# Altium PCB Buck converter.PcbDoc
Units mm, origin at the board's own origin, x right, y up, seen from the top; angles counter-clockwise.
Board outline 33 x 15 mm, 2 copper layers (Top Layer, Bottom Layer); 20 components, 7 nets, 42 pads, 17 vias.
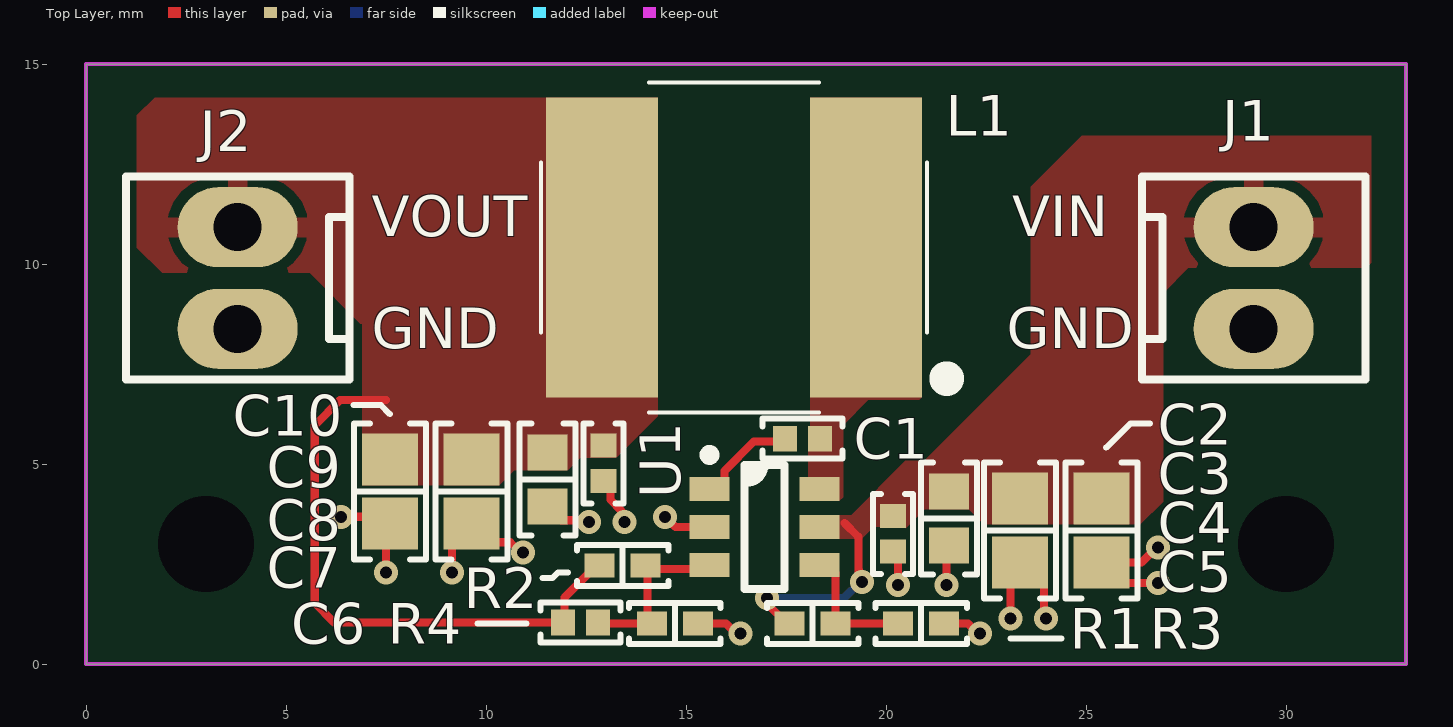
[diagram p0: Top Layer view]
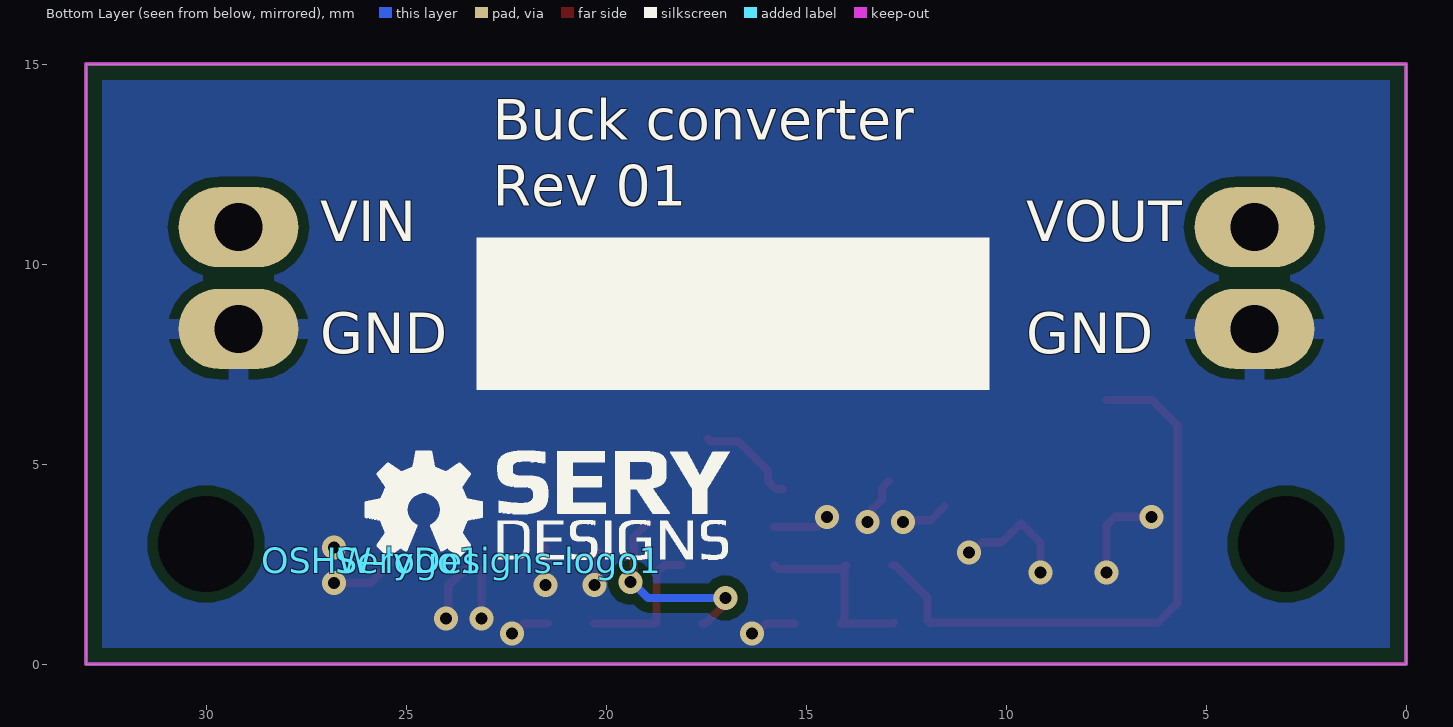
[diagram p1: Bottom Layer view, seen from below]

## Layer stack, top to bottom
Top Solder: solder mask 0.0102, Solder Resist, Dk 3.5
Top Layer: signal copper 0.0356
Dielectric 1: dielectric 0.32, FR-4, Dk 4.8
Bottom Layer: signal copper 0.0356
Bottom Solder: solder mask 0.0102, Solder Resist, Dk 3.5

## Board outline
0,0 0,15 33,15 33,0

## Design rules (kind name [scope] priority, off if disabled: settings)
BoardOutlineClearance [All] p1: gap=0.4 ignorepadtopadclearanceinfootprint=FALSE
Clearance [All] p1: gap=0.254 ignorepadtopadclearanceinfootprint=FALSE except(0: SMDPad-Hole THPad-Hole Via-Hole Fill-Hole Poly-Hole Region-Hole Text-Hole; 0.127: SMDPad-SMDPad; 0.2: Arc-SMDPad Arc-THPad Track-SMDPad Track-THPad; 0.5: SMDPad-THPad THPad-THPad THPad-Via)
HoleSize [All] p1: absolutevalues=TRUE maxlimit=2.54 minlimit=0.3 maxpercent=80.000 minpercent=20.000
HoleToHoleClearance [All] p1: gap=0.5 allowstackedmicrovias=TRUE
MinimumAnnularRing [All] p1: minimumring=0.13
MinimumSolderMaskSliver [All] p1: minsoldermaskwidth=0.12
PolygonConnect [All] p1: connectstyle=Relief reliefconductorwidth=0.254 reliefentries=4 polygonreliefangle="90 Angle" airgapwidth=0.254
RoutingVias [All] p1: holewidth=0.3 width=0.6 viastyle="Through Hole" minholewidth=0.3 minwidth=0.5 maxholewidth=0.6 maxwidth=1
SilkToSilkClearance [All] p1: silktosilkclearance=0
SilkToSolderMaskClearance [IsPad] p1: minsilkscreentomaskgap=0.05 clearancetoexposedcopper=TRUE
SolderMaskExpansion [All] p1: expansion=0.05 istentingtop=FALSE
Width [All] p1: maxlimit=1.016 minlimit=0.127 preferedwidth=0.203
25 further rules are at their usual default settings.

## Components (designator, comment, footprint, x,y, rotation, side; value= is the part's Value field where it differs from the comment)
C1 "0.1 µF" "CAP 0402_1005" 17.907,5.639 r180 top
C2 "10 µF" "CAP 0805_2012" 25.38,3.343 r90 top
C3 "10 µF" "CAP 0805_2012" 23.348,3.343 r90 top
C4 "1 µF" "CAP 0603_1608" 21.57,3.643 r90 top
C5 "0.1 µF" "CAP 0402_1005" 20.173,3.258 r90 top
C6 "12 pF" "CAP 0402_1005" 12.362,1.041 r180 top
C7 "0.1 µF" "CAP 0402_1005" 12.934,5.021 r90 top
C8 "1 µF" "CAP 0603_1608" 11.537,4.621 r90 top
C9 "10 µF" "CAP 0805_2012" 9.632,4.321 r90 top
C10 "10 µF" "CAP 0805_2012" 7.6,4.321 r90 top
J1 "0022272021" "MOLEX KK 0022272021" 29.19,9.652 r270 top
J2 "0022272021" "MOLEX KK 0022272021" 3.79,9.652 r90 top
L1 "22uH" NRS8040T220MJGJV 16.197,10.414 r180 top value=22µH
OSHW-logo1 "OSHW-logo" OSHW-logo 25.857,2.591 r180 bottom
R1 "22k" "RES 0402_1005" 18.162,1.016 r180 top
R2 "110k" "RES 0402_1005" 13.411,2.464 r180 top
R3 "10k" "RES 0402_1005" 20.875,1.016 r180 top
R4 "15k" "RES 0402_1005" 14.718,1.016 r180 top
SeryDesigns-logo1 "SeryDesigns-logo" SeryDesigns-logo 22.682,2.591 r180 bottom
U1 "RT6222D" sot23-6 16.959,3.429 r0 top value=SGM61410

## Footprints (in the part's own frame and the unit in brackets; to place one, negate y for a bottom-side part, rotate by r counter-clockwise, add the part's x,y. Pads: shape width x height; smd on the part's side, far side on the other; paste and mask are expansions set on the pad)
"CAP 0402_1005" [mm] "Chip Capacitor, 2-Leads, Body 1.02x0.51mm, IPC Medium Density"
  rect 0.6x0.64 smd: 1(-0.44,0) 2(0.44,0)
  silkscreen extent -1,-0.5 1,0.5, body extent -0.5,-0.26 0.5,0.26, height 0.52
"CAP 0603_1608" [mm] "Chip Capacitor, 2-Leads, Body 1.60x0.80mm, IPC Medium Density"
  rect 0.9x1 smd: 1(-0.675,0) 2(0.675,0)
  silkscreen extent -1.4,-0.7 1.4,0.7, body extent -0.8,-0.41 0.8,0.41, height 0.82
"CAP 0805_2012" [mm] "Chip Capacitor, 2-Leads, Body 2.00x1.20mm, IPC Medium Density"
  rect 1.3x1.4 smd: 1(-0.8,0) 2(0.8,0)
  silkscreen extent -1.7,-0.9 1.7,0.9, body extent -1,-0.64 1,0.64, height 1.26
"MOLEX KK 0022272021" [mm]
  oval 2x3 hole 1.2: 1(-1.27,0) 2(1.27,0)
  silkscreen extent -2.54,-2.79 2.54,2.79, body extent -2.54,-2.9 2.54,2.9, height 11.7
NRS8040T220MJGJV [mil]
  rect 110x295 smd paste+0 mask+0: 1(-130,0) 2(130,0)
  silkscreen extent -211,-162 190,162, body extent -157,-160 157,155, height 157
OSHW-logo [mm] "OSHW logo, no writing"
  silkscreen extent -0.17,0.1 2.77,2.74
"RES 0402_1005" [mm] "Chip Resistor, 2-Leads, Body 1.0x0.5mm, IPC Medium Density"
  rect 0.75x0.6 smd: 1(-0.575,0) 2(0.575,0)
  silkscreen extent -1.14,-0.51 1.14,0.51, body extent -0.5,-0.25 0.5,0.25, height 0.35
SeryDesigns-logo [mm] "Sery designs logo"
  silkscreen extent -0.04,0.02 5.77,2.74
sot23-6 [mm] "SOT23, 6-Leads, Body 2.90x2.80mm, Pitch 0.95mm, IPC Medium Density"
  rect 1x0.6 smd: 1(-1.375,0.95) 2(-1.375,0) 3(-1.375,-0.95) 4(1.375,-0.95) 5(1.375,0) 6(1.375,0.95)
  silkscreen extent -1.5,-1.55 0.5,1.92, body extent -1.5,-1.5 1.5,1.5, height 1.45

## Part data
C1 C5 C7: library part GRT155R71H104KE01D, "CAP CER 0.1UF 50V X7R 0402", Device Package="0402 (1005 Metric)", manufacturer="Murata Electronics", Operating Temperature="-55°C ~ 125°C", Ratings=AEC-Q200, Supplier Part Number 1=490-GRT155R71H104KE01DCT-ND, Temperature Coefficient=X7R, Tolerance=±10%, Voltage - Rated=50V, Applications=Automotive, Capacitance="0.1 µF", componentlink2description="DigiKey Link", componentlink2url=https://www.digikey.com/en/products/detail/murata-electronics/GRT155R71H104KE01D/10704679, lastupdated="9/19/2022 12:56:46 PM", Lifecycle Status=Active, Minimum Order=1, Mounting Type="Surface Mount, MLCC", Package / Case="0402 (1005 Metric)", packaging=TapeAndReel, Part Number=GRT155R71H104KE01D, Part Status=Active, partid=44223, price=0.01, series=GRT, Size / Dimension="0.039\" L x 0.020\" W (1.00mm x 0.50mm)", Supplier 1=DigiKey, Thickness (Max)="0.022\" (0.55mm)"
C2 C3 C9 C10: library part GRM21BR61H106ME43L, "CAP CER 10UF 50V X5R 0805", Device Package="0805 (2012 Metric)", manufacturer="Murata Electronics", Operating Temperature="-55°C ~ 85°C", Supplier Part Number 1=490-18664-1-ND, Temperature Coefficient=X5R, Tolerance=±20%, Voltage - Rated=50V, Applications="General Purpose", Capacitance="10 µF", componentlink1description=Datasheet, componentlink1url=https://search.murata.co.jp/Ceramy/image/img/A01X/G101/ENG/GRM21BR61H106ME43-01A.pdf, componentlink2description="DigiKey Link", componentlink2url=https://www.digikey.com/en/products/detail/murata-electronics/GRM21BR61H106ME43L/10326317, lastupdated="9/19/2022 1:04:12 PM", Lifecycle Status=Active, Minimum Order=1, Mounting Type="Surface Mount, MLCC", Package / Case="0805 (2012 Metric)", packaging=TapeAndReel, Part Number=GRM21BR61H106ME43L, Part Status=Active, partid=41295, price=0.08, series=GRM, Size / Dimension="0.079\" L x 0.049\" W (2.00mm x 1.25mm)", Supplier 1=DigiKey, Thickness (Max)="0.057\" (1.45mm)"
C4 C8: library part UMK107AB7105KA-T, "CAP CER 1UF 50V X7R 0603", Device Package="0603 (1608 Metric)", manufacturer="Taiyo Yuden", Operating Temperature="-55°C ~ 125°C", Supplier Part Number 1=587-3247-1-ND, Temperature Coefficient=X7R, Tolerance=±10%, Voltage - Rated=50V, Applications="SMPS Filtering", Capacitance="1 µF", componentlink1description=Datasheet, componentlink1url=https://www.yuden.co.jp/productdata/catalog/mlcc01_e.pdf, componentlink2description="DigiKey Link", componentlink2url=https://www.digikey.com/en/products/detail/taiyo-yuden/UMK107AB7105KA-T/3660085, lastupdated="9/19/2022 1:00:51 PM", Lifecycle Status=Active, Minimum Order=1, Mounting Type="Surface Mount, MLCC", Package / Case="0603 (1608 Metric)", packaging=TapeAndReel, Part Number=UMK107AB7105KA-T, Part Status=Active, partid=46688, price=0.04, series=M, Size / Dimension="0.063\" L x 0.031\" W (1.60mm x 0.80mm)", Supplier 1=DigiKey, Thickness (Max)="0.037\" (0.95mm)"
C6: library part GCM1555C1H120JA16D, "CAP CER 12PF 50V C0G/NP0 0402", Device Package="0402 (1005 Metric)", manufacturer="Murata Electronics", Operating Temperature="-55°C ~ 125°C", Ratings=AEC-Q200, Supplier Part Number 1=490-12649-1-ND, Temperature Coefficient="C0G, NP0", Tolerance=±5%, Voltage - Rated=50V, Applications=Automotive, Capacitance="12 pF", componentlink1description=Datasheet, componentlink1url=https://www.murata.com/~/media/webrenewal/support/library/catalog/products/capacitor/mlcc/c03e.ashx?la=en-us, componentlink2description="DigiKey Link", componentlink2url=https://www.digikey.com/en/products/detail/murata-electronics/GCM1555C1H120JA16D/4903551, lastupdated="9/19/2022 12:57:22 PM", Lifecycle Status=Active, Minimum Order=1, Mounting Type="Surface Mount, MLCC", Package / Case="0402 (1005 Metric)", packaging=TapeAndReel, Part Number=GCM1555C1H120JA16D, Part Status=Active, partid=5824, price=0.01, series=GCM, Size / Dimension="0.039\" L x 0.020\" W (1.00mm x 0.50mm)", Supplier 1=DigiKey, Thickness (Max)="0.022\" (0.55mm)"
J1 J2: "CONN HEADER VERT 2POS 2.54MM", Insulation Color=Natural, manufacturer=Molex, Material Flammability Rating="UL94 V-0", Supplier Part Number 1=WM4111-ND, componentlink1description=Datasheet, componentlink1url=https://www.molex.com/pdm_docs/sd/022272021_sd.pdf, componentlink2description="DigiKey Link", componentlink2url=http://digikey.com/product-detail/en/molex/0022272021/WM4111-ND/1130577, Connector Type=Header, Contact Finish - Mating=Tin, Contact Finish - Post=Tin, Contact Finish Thickness - Mating="100.0µin (2.54µm)", Contact Length - Mating="0.295\" (7.49mm)", Contact Length - Post="0.140\" (3.56mm)", Contact Material=Brass, Contact Shape=Square, Contact Type="Male Pin", Fastening Type="Friction Lock", Insulation Height="0.461\" (11.70mm)", Insulation Material="Polyamide (PA), Nylon", lastupdated="1/12/2020 11:51:43 PM", Lifecycle Status=Active, Minimum Order=1, Mounting Type="Through Hole", Number of Positions=2, Number of Positions Loaded=All, Number of Rows=1, Overall Contact Length="0.560\" (14.22mm)", packaging=Bulk, Part Number=0022272021, Part Status=Active, partid=76, Pitch - Mating="0.100\" (2.54mm)", price=0.27, series="KK 6410", Shrouding="Shrouded - 1 Wall", Style="Board to Cable/Wire", Supplier 1=DigiKey, Termination=Solder
L1: library part NRS8040T220MJGJV, "Inductor, Fixed, SMD, 22µH, 2.2A", Current=2.2A, Package="Custom SMT", Part Number=6006M0220F000, Power=N/A, Supplier Part Number 1=587-3655-2-ND, Temp Range="-40°C ~ 125°C", Tolerance=±20%, componentlink1description=Datasheet, componentlink1url=https://ds.yuden.co.jp/TYCOMPAS/ut/detail?pn=LCXNH8080YKL220MJG&u=M, Family="Inductors (Fixed)", MF="Taiyo Yuden", Mount Type=SMT, MPN=NRS8040T220MJGJV, Special=N/A, Supplier 1=Digi-Key, Voltage=N/A
OSHW-logo1: "OSHW logo, no writing"
R1: library part CR0402-FX-2202GLF, "RES SMD 22K OHM 1% 1/16W 0402", Device Package="0402 (1005 Metric)", manufacturer="Bourns Inc.", Operating Temperature="-55°C ~ 155°C", Power (Watts)="0.063W, 1/16W", Resistance="22 kOhms", Supplier Device Package=0402, Supplier Part Number 1=CR0402-FX-2202GLFCT-ND, Temperature Coefficient=±100ppm/°C, Tolerance=±1%, componentlink1description=Datasheet, componentlink1url=https://www.bourns.com/docs/Product-Datasheets/CR0402.pdf, componentlink2description="DigiKey Link", componentlink2url=https://www.digikey.com/en/products/detail/bourns-inc/CR0402-FX-2202GLF/3783230, Composition="Thick Film", Height - Seated (Max)="0.016\" (0.40mm)", lastupdated="9/19/2022 1:14:50 PM", Lifecycle Status=Active, Minimum Order=1, Number of Terminations=2, Package / Case="0402 (1005 Metric)", packaging=CutTape, Part Number=CR0402-FX-2202GLF, Part Status=Active, partid=6638, price=0.01, series=CR0402, Size / Dimension="0.039\" L x 0.020\" W (1.00mm x 0.50mm)", Supplier 1=DigiKey
R2: library part AF0402FR-07110KL, "RES SMD 110K OHM 1% 1/16W 0402", Device Package="0402 (1005 Metric)", manufacturer=Yageo, Operating Temperature="-55°C ~ 155°C", Power (Watts)="0.063W, 1/16W", Ratings=AEC-Q200, Resistance="110 kOhms", Supplier Device Package=0402, Supplier Part Number 1=13-AF0402FR-07110KLCT-ND, Temperature Coefficient=±100ppm/°C, Tolerance=±1%, componentlink1description=Datasheet, componentlink1url=https://www.yageo.com/upload/media/product/productsearch/datasheet/rchip/PYu-AF_51_RoHS_L_6.pdf, componentlink2description="DigiKey Link", componentlink2url=https://www.digikey.com/en/products/detail/yageo/AF0402FR-07110KL/5900404, Composition="Thick Film", Features="Anti-Sulfur, Automotive AEC-Q200", Height - Seated (Max)="0.015\" (0.37mm)", lastupdated="9/19/2022 1:13:54 PM", Lifecycle Status=Active, Minimum Order=1, Number of Terminations=2, Package / Case="0402 (1005 Metric)", packaging=TapeAndReel, Part Number=AF0402FR-07110KL, Part Status=Active, partid=60378, price=0.01, series=AF, Size / Dimension="0.039\" L x 0.020\" W (1.00mm x 0.50mm)", Supplier 1=DigiKey
R3: library part RE0402FRE0710KL, "RES SMD 10K OHM 1% 1/16W 0402", Device Package="0402 (1005 Metric)", manufacturer=Yageo, Operating Temperature="-55°C ~ 155°C", Power (Watts)="0.063W, 1/16W", Resistance="10 kOhms", Supplier Device Package=0402, Supplier Part Number 1=13-RE0402FRE0710KLCT-ND, Temperature Coefficient=±50ppm/°C, Tolerance=±1%, componentlink1description=Datasheet, componentlink1url=https://www.yageo.com/upload/media/product/productsearch/datasheet/rchip/PYu-RE_105_RoHS_L_6.pdf, componentlink2description="DigiKey Link", componentlink2url=https://www.digikey.com/en/products/detail/yageo/RE0402FRE0710KL/5922980, Composition="Thick Film", Height - Seated (Max)="0.015\" (0.37mm)", lastupdated="9/19/2022 1:13:38 PM", Lifecycle Status=Active, Minimum Order=1, Number of Terminations=2, Package / Case="0402 (1005 Metric)", packaging=CutTape, Part Number=RE0402FRE0710KL, Part Status=Active, partid=68060, price=0.01, series=RE, Size / Dimension="0.039\" L x 0.020\" W (1.00mm x 0.50mm)", Supplier 1=DigiKey
R4: library part CRCW040215K0FKED, "RES SMD 15K OHM 1% 1/16W 0402", Device Package="0402 (1005 Metric)", manufacturer="Vishay Dale", Operating Temperature="-55°C ~ 155°C", Power (Watts)="0.063W, 1/16W", Ratings=AEC-Q200, Resistance="15 kOhms", Supplier Device Package=0402, Supplier Part Number 1=541-15.0KLCT-ND, Temperature Coefficient=±100ppm/°C, Tolerance=±1%, componentlink1description=Datasheet, componentlink1url=http://www.vishay.com/docs/20035/dcrcwe3.pdf, componentlink2description="DigiKey Link", componentlink2url=https://www.digikey.com/en/products/detail/vishay-dale/CRCW040215K0FKED/1178139, Composition="Thick Film", Features="Automotive AEC-Q200", Height - Seated (Max)="0.016\" (0.40mm)", lastupdated="9/19/2022 1:14:19 PM", Lifecycle Status=Active, Minimum Order=1, Number of Terminations=2, Package / Case="0402 (1005 Metric)", packaging=CutTape, Part Number=CRCW040215K0FKED, Part Status=Active, partid=16217, price=0.01, series=CRCW, Size / Dimension="0.039\" L x 0.020\" W (1.00mm x 0.50mm)", Supplier 1=DigiKey
SeryDesigns-logo1: "Sery designs logo"
U1: "IC, SMD, 2A, 1.4MHz,  Synchronous Buck Converter, SOT-23-6", MPN=SGM61410, Package=SOT-23-6, Part Number=710GLSGM61410, Supplier Part Number 1=N/A, componentlink1description=Datasheet, componentlink1url=http://www.sg-micro.com/uploads/soft/20220513/1652411174.pdf, Family=ICs, MF=SGMicro, Mount Type=SMT, Supplier 1=Digi-Key, Temp Range=N/A

## Free pads (board coordinates)
  round 0 hole 2.4 unplated: 1(3,3) 2(30,3)

## Via types
v1: diameter 0.6, hole 0.3, Top Layer to Bottom Layer, tented both sides, 17 vias

## Nets (pads, with @x,y where several pads share a name; then routed paths per layer and width w, separated by ;. In a path a pad name is that pad's centre, name@x,y a point inside that pad or via, vN(x,y) a via of type N, cw(c..) or ccw(c..) an arc to the next point about the centre after c; other vN are vias at no path point)
+5V: C6.2 C7.2 C8.2 C9.2 C10.2 J2.2 L1.2 R2.2 | length 14.8
  Top Layer w0.203: 7.493,6.604 6.35,6.604 5.715,5.969 5.715,1.524 6.198,1.041 C6.2 ; C6.2@11.896,1.016 11.964,1.083 11.964,1.666 12.761,2.464 R2.2
+12V: C2.2 C3.2 C4.2 C5.2 J1.1 R1.2 U1.5 | length 5.1
  Top Layer w0.203: v1(17.018,1.651) 17.094,1.575 17.094,1.434 17.512,1.016 R1.2 ; 18.957,3.53 19.304,3.183 19.304,3.175 19.308,3.171 19.308,2.365 19.317,2.357 19.317,2.124 v1(19.393,2.048)
  Bottom Layer w0.203: v1(17.018,1.651) 18.948,1.651 19.345,2.048 v1(19.393,2.048)
BOOT: C1.2 U1.1 | length 2.6
  Top Layer w0.203: U1.1 15.758,4.379 15.956,4.577 15.956,4.831 16.69,5.565 17.393,5.565 C1.2
EN: R1.1 R3.2 U1.4 | length 3.5
  Top Layer w0.203: U1.4@18.114,2.479 18.544,2.479 18.737,2.286 R1.1 ; R1.1@18.812,1.016 R3.2
FB: C6.1 R2.1 R4.2 U1.3 | length 4.9
  Top Layer w0.203: C6.1 12.827,1.016 R4.2 14.038,1.121 R2.1@14.038,2.464 ; R2.1 14.067,2.383 U1.3@15.708,2.383 ; U1.3@15.708,2.383 15.804,2.479 U1.3@15.708,2.383
GND: C2.1 C3.1 C4.1 C5.1 C7.1 C8.1 C9.1 C10.1 J1.2 J2.1 R3.1 R4.1 U1.2 | length 19.8
  Top Layer w0.203: v1(6.371,3.683) 7.276,3.683 7.493,3.466 v1(7.493,2.286) ; v1(9.144,2.286) 9.144,3.033 C9.1 10.105,3.048 10.605,3.048 10.859,2.794 v1(10.922,2.794) ; C8.1 11.885,3.598 12.531,3.598 v1(12.573,3.556) ; C7.1 13.106,4.409 13.106,4.109 13.386,3.829 13.386,3.632 v1(13.462,3.556) ; v1(14.478,3.683) 14.732,3.429 U1.2@15.804,3.429 ; R4.1 15.996,1.016 16.25,0.762 v1(16.358,0.762) ; C5.1 20.295,2.696 v1(20.295,1.981) ; R3.1 22.05,1.016 22.304,0.762 v1(22.352,0.762) ; v1(21.514,1.981) 21.514,2.912 C4.1 ; v1(23.114,1.143) 23.114,2.309 C3.1 23.876,2.015 23.926,2.015 23.946,1.995 23.946,1.2 v1(24.003,1.143) ; v1(26.797,2.032) 25.891,2.032 C2.1 26.385,2.543 26.763,2.921 v1(26.797,2.921)
SW: C1.1 L1.1 U1.6

## Polygon pours and split planes (outlines as drawn)
GND on Bottom Layer "GND_L02_P000" (solid, pour order 0): 0,15 33,15 33,0 0,0
+12V on Top Layer "+12V_L01_P001" (solid, pour order 1): 23.622,7.747 23.622,11.938 24.892,13.208 32.131,13.208 32.131,10.033 32.004,9.906 27.559,9.906 26.924,9.271 26.924,4.064 26.353,3.493 22.445,3.493 22.07,3.868 20.963,3.868 20.493,3.398 20.462,3.429 19.685,3.429 19.393,3.137 18.768,3.137 18.765,3.134 18.764,3.135 18.533,3.135 18.533,3.721 18.532,3.723 18.533,3.724 19.122,3.724 20.478,5.08 20.955,5.08
+5V on Top Layer "+5V_L01_P003" (solid, pour order 3): 14.292,14.161 14.292,6.199 13.254,5.161 12.352,5.161 12.037,4.846 10.707,4.846 10.332,4.471 6.9,4.471 6.9,8.509 6.858,8.509 5.588,9.779 1.905,9.779 1.27,10.414 1.27,13.716 1.715,14.161
SW on Top Layer "SW_L01_P002" (solid, pour order 2): 18.114,4.084 18.839,4.084 18.923,4.168 18.923,5.969 19.558,6.604 20.833,6.604 20.896,6.668 20.896,14.161 18.102,14.161 18.102,5.954 18.056,5.908 18.056,4.437 18.114,4.379

## Keep-outs
Keep-Out Layer:
  the board outline again, w0.1

## Silkscreen, mask and mechanical layers (free items; w line width, h text height)
Top Overlay:
  lines w0.15: 6.68,6.477 7.366,6.477 7.595,6.248 ; 9.779,1.016 11.015,1.016 ; 11.41,2.159 11.664,2.159 11.791,2.286 12.045,2.286 ; 23.114,0.635 24.003,0.635 24.384,0.635 ; 25.502,5.41 26.111,6.02 26.594,6.02
  text "VOUT" at 7.137,10.693 h1.02
  text "VIN" at 23.154,10.693 h1.02
  text "GND" at 7.137,7.899 h1.02
  text "GND" at 23.012,7.899 h1.02
Bottom Overlay:
  rectangle: 10.414,6.858 23.241,10.668
  text "Buck converter" at 22.835,13.106 h1.02
  text "Rev 01" at 22.835,11.455 h1.02
  text "VOUT" at 9.5,10.566 h1.02
  text "VIN" at 27.153,10.566 h1.02
  text "GND" at 9.5,7.772 h1.02
  text "GND" at 27.153,7.772 h1.02

## Text inside footprints (layer, text, board x,y; h text height)
L1: Top Assembly "1" at 19.626,10.922 h1.02 r180